# Altium PCB 红外学习模块基础版尺寸图.PcbDoc
Units mil, origin at the board's own origin, x right, y up, seen from the top; angles counter-clockwise.
Board outline 629.92 x 629.92 mil, 2 copper layers (Top Layer, Bottom Layer); 10 components, 11 nets, 30 pads, 0 vias.
Unrouted connection lines stored in the file: 18.
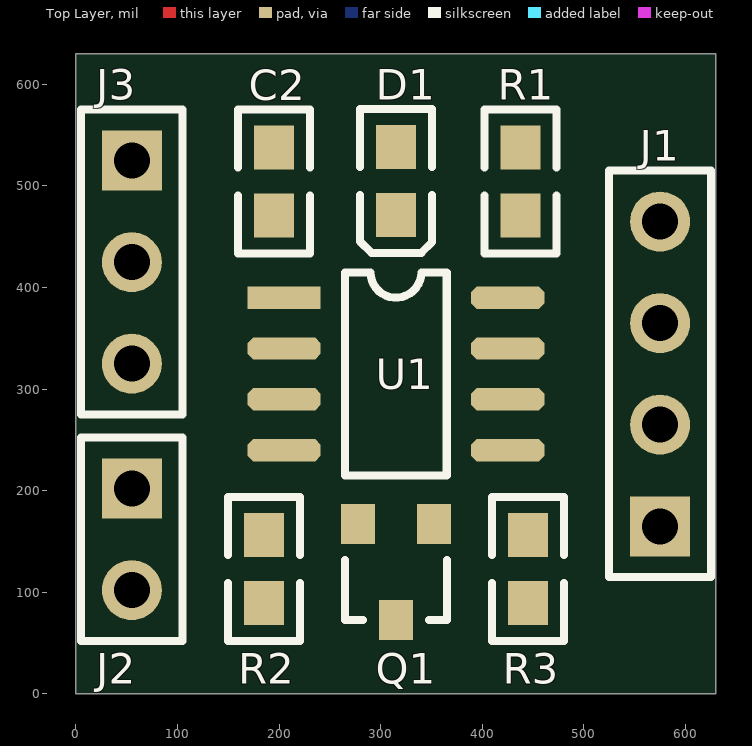
[diagram p0: Top Layer view]
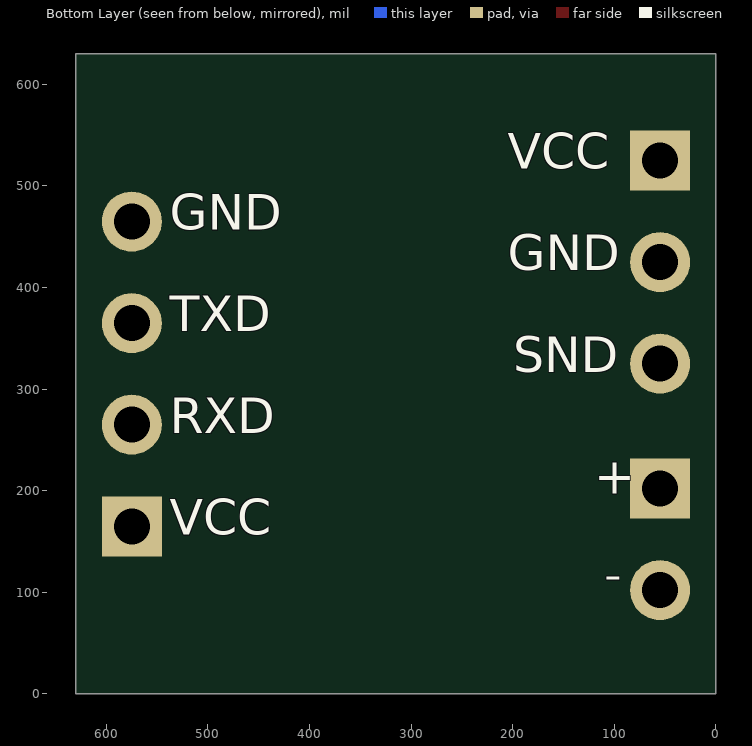
[diagram p1: Bottom Layer view, seen from below]

## Layer stack, top to bottom
Top Layer: signal copper 1.4
Dielectric: dielectric 12.6, FR-4, Dk 4.8
Bottom Layer: signal copper 1.4

## Board outline
0,0 629.92,0 629.92,629.92 0,629.92

## Design rules (kind name [scope] priority, off if disabled: settings)
Clearance [All] p1: gap=6
HoleToHoleClearance [All] p1: gap=0 allowstackedmicrovias=TRUE
MinimumSolderMaskSliver [All] p1: minsoldermaskwidth=0
PolygonConnect [All] p1: connectstyle=Relief reliefconductorwidth=10 reliefentries=4 polygonreliefangle="90 Angle"
RoutingVias [All] p1: holewidth=28 width=50 viastyle="Through Hole" minholewidth=28 minwidth=50 maxholewidth=28 maxwidth=50
SilkToSilkClearance [All] p1: silktosilkclearance=0
SilkscreenOverComponentPads SilkToSolderMaskClearance [IsPad] p1: minsilkscreentomaskgap=0
SolderMaskExpansion [All] p1: expansion=4
Width [All] p1: maxlimit=500 minlimit=6 preferedwidth=6
24 further rules are at their usual default settings.

## Components (designator, comment, footprint, x,y, rotation, side; value= is the part's Value field where it differs from the comment)
C2 "104" 0603 195,504.13 r90 top
D1 "LED" 0603L 314.96,505 r270 top
J1 "DEBUG" HDR1X4 574.92,314.96 r90 top
J2 "Header 2" HDR1X2 55,152.19 r270 top
J3 "红外接收" HDR1X3 55,425 r270 top
Q1 "SS8050" SOT-23 314.96,120 r180 top
R1 "Res2" 0603 437.66,504.13 r90 top
R2 "Res2" 0603 185,123.06 r270 top
R3 "Res2" 0603 445,123.06 r270 top
U1 "STC8F1K08" SOP8 314.96,314.96 r270 top

## Footprints (in the part's own frame and the unit in brackets; to place one, negate y for a bottom-side part, rotate by r counter-clockwise, add the part's x,y. Pads: shape width x height; smd on the part's side, far side on the other; paste and mask are expansions set on the pad)
0603 [mm]
  rect 1.1x1 smd: 1(-0.85,0) 2(0.85,0)
  silkscreen extent -1.8,-0.9 1.8,0.9
0603L [mm]
  rect 1.1x1 smd: 1(-0.85,0) 2(0.85,0)
  silkscreen extent -1.8,-0.9 1.8,0.9
HDR1X2 [mm] "Connector; Header; 2 Posit"
  rect 1.5x1.5 hole 0.9: 1(-1.27,0)
  round 1.5 hole 0.9: 2(1.27,0)
  silkscreen extent -2.54,-1.27 2.54,1.27
HDR1X3 [mm] "Connector; Header; 3 Posit"
  rect 1.5x1.5 hole 0.9: 1(-2.54,0)
  round 1.5 hole 0.9: 2(0,0) 3(2.54,0)
  silkscreen extent -3.81,-1.27 3.81,1.27
HDR1X4 [mm] "Connector; Header; 4 Posit"
  rect 1.5x1.5 hole 0.9: 1(-3.81,0)
  round 1.5 hole 0.9: 2(-1.27,0) 3(1.27,0) 4(3.81,0)
  silkscreen extent -5.08,-1.27 5.08,1.27
SOP8 [mil]
  rect 22x72 smd: 1(-75,-110)
  oct 22x72 smd: 2(-25,-110) 3(25,-110) 4(75,-110) 5(75,110) 6(25,110) 7(-25,110) 8(-75,110)
  silkscreen extent -100,-50 100,50
SOT-23 [mm]
  rect 0.85x1 smd: 1(-0.95,-1.2) 2(0.95,-1.2) 3(0,1.2)
  silkscreen extent -1.27,-0.3 1.27,1.2

## Part data
C2: library part Cap, "Capaci"
J1: library part "Header 4", "Header, 4-Pin"
J2: "Header, 2-Pin"
J3: library part "Header 3", "Header, 3-Pin"
R1 R2 R3: "Resis"
U1: library part STC8F1

## Nets (pads, with @x,y where several pads share a name; then routed paths per layer and width w, separated by ;. In a path a pad name is that pad's centre, name@x,y a point inside that pad or via, vN(x,y) a via of type N, cw(c..) or ccw(c..) an arc to the next point about the centre after c; other vN are vias at no path point)
GND: C2.1 J1.4 J3.2 Q1.2 U1.4
LED: D1.2 U1.1
NetD1_1: D1.1 R1.1
NetJ2_1: J2.1 R2.1
NetJ2_2: J2.2 Q1.3
NetQ1_1: Q1.1 R3.2
REC: J3.3 U1.7
RXD: J1.2 U1.5
SND: R3.1 U1.3
TXD: J1.3 U1.6
VCC: C2.2 J1.1 J3.1 R1.2 R2.2 U1.2
pads on no net: U1.8

## Silkscreen, mask and mechanical layers (free items; w line width, h text height)
Bottom Overlay:
  text "VCC" at 205,505 h60
  text "GND" at 537.61,445 h60
  text "GND" at 205,405 h60
  text "TXD" at 537.61,345 h60
  text "SND" at 199.45,305 h60
  text "RXD" at 537.61,245 h60
  text "+" at 120,185 h60
  text "VCC" at 537.55,145 h60
  text "-" at 110,89.59 h60